# Altium PCB PCB1.pcbdoc
Units mil, origin at the board's own origin, x right, y up, seen from the top; angles counter-clockwise.
Board outline 6015 x 5210 mil, 2 copper layers (Top Layer, Bottom Layer); 51 components, 66 nets, 215 pads, 159 vias.
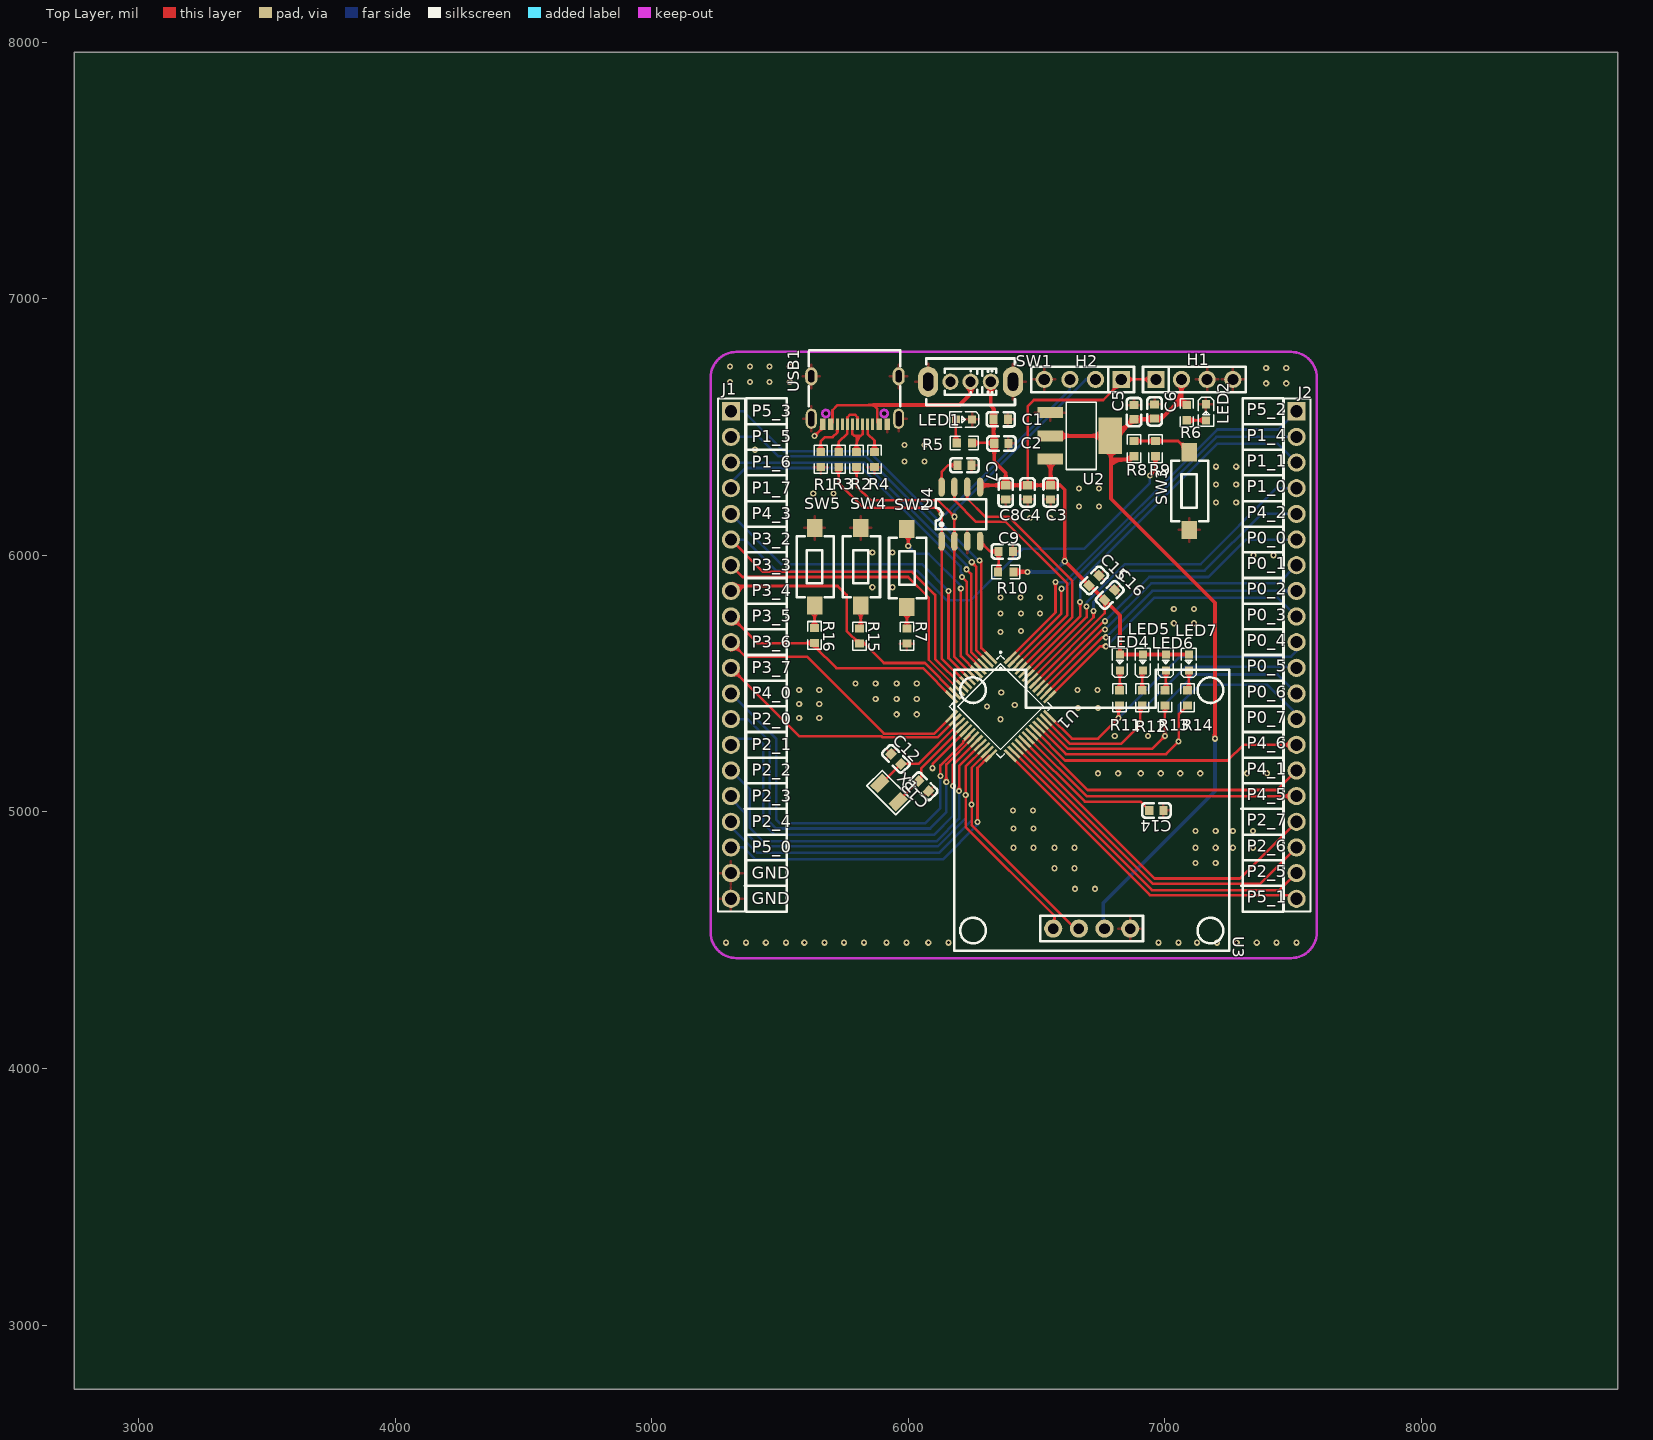
[diagram p0: Top Layer view]
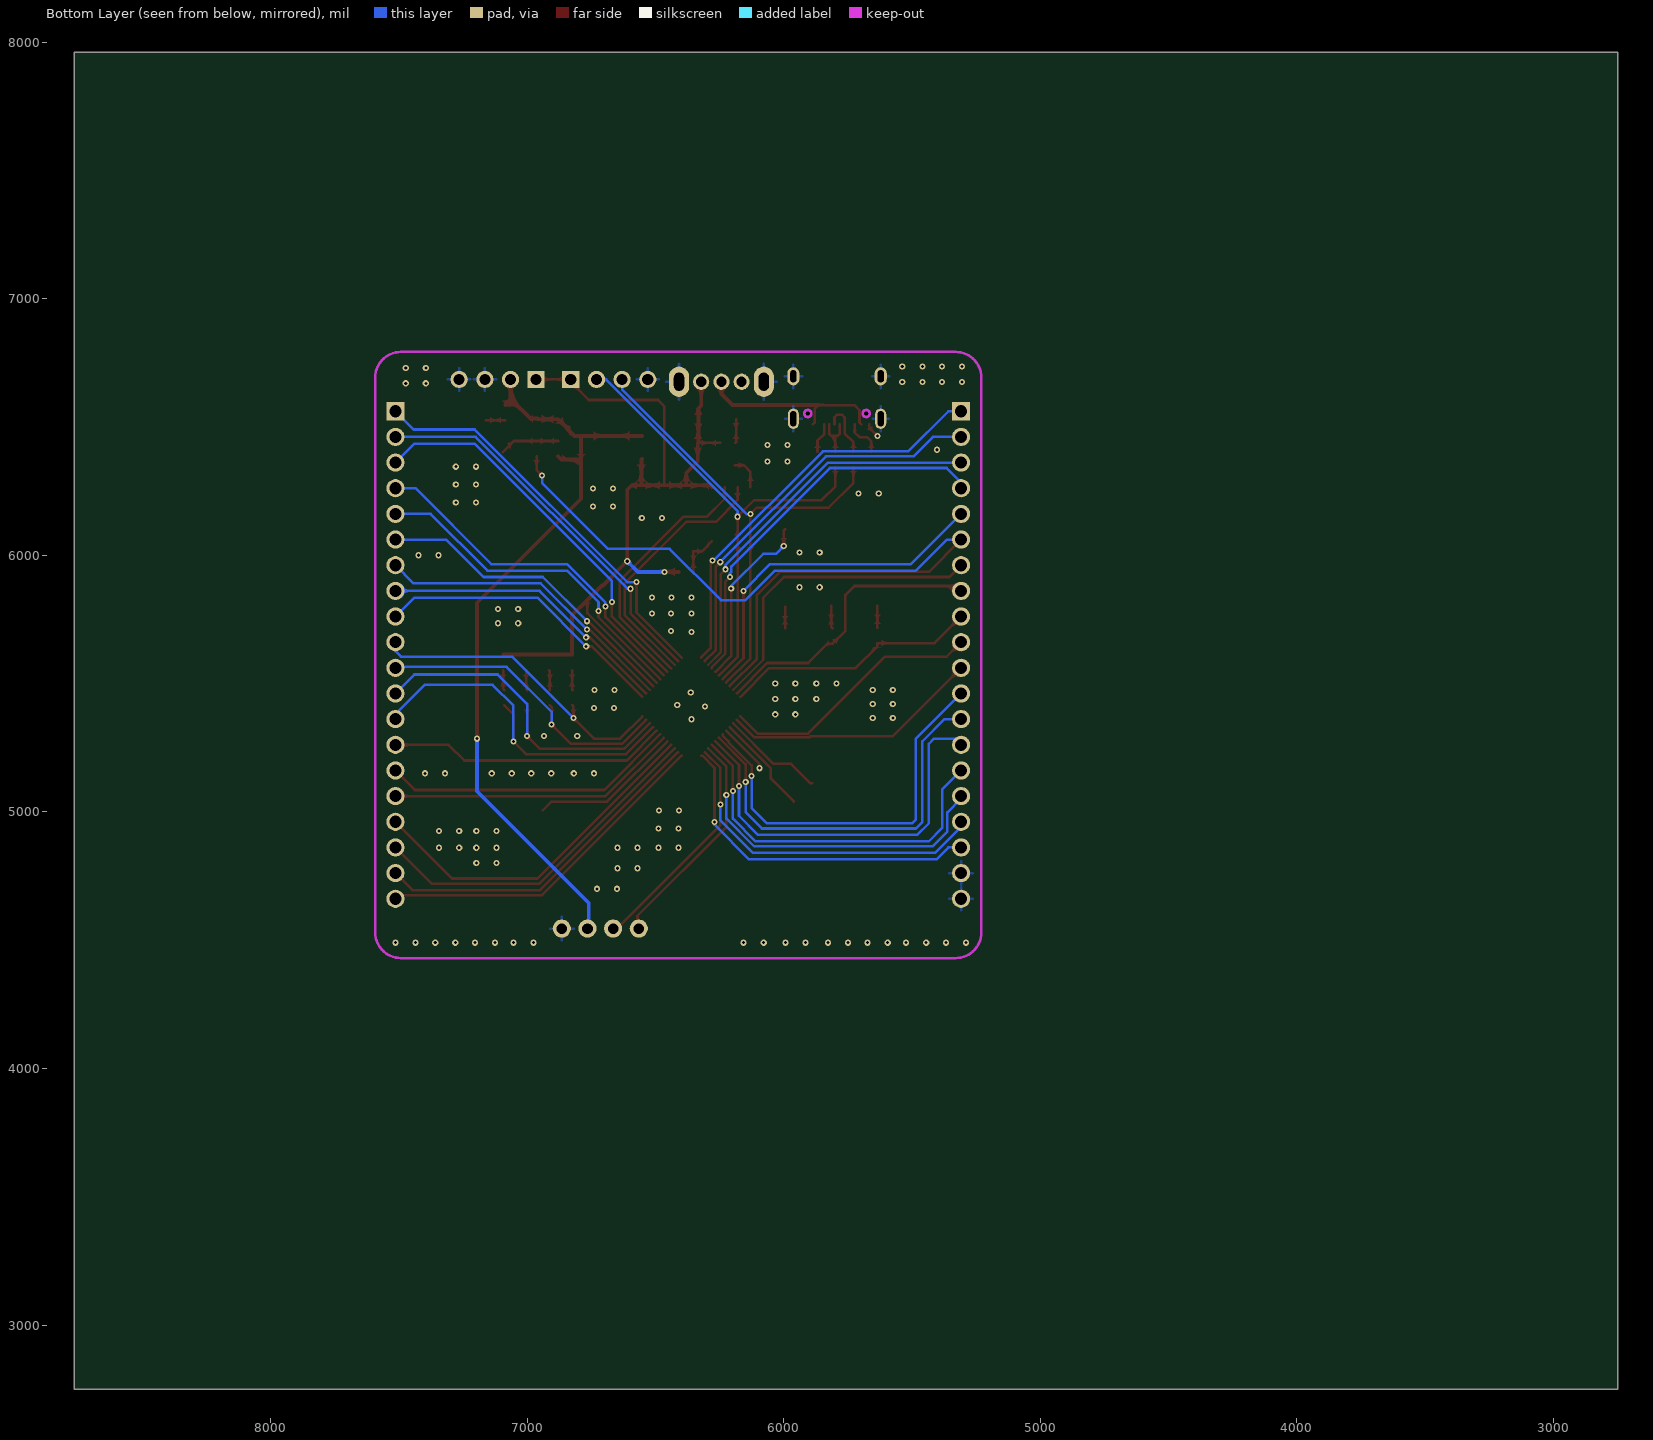
[diagram p1: Bottom Layer view, seen from below]

## Layer stack, top to bottom
Top Layer: signal copper (thickness not stored)
Dielectric: dielectric 12.6, FR-4, Dk 4.8
Bottom Layer: signal copper (thickness not stored)

## Board outline
8765,2750 2750,2750 2750,7960 8765,7960

## Design rules (kind name [scope] priority, off if disabled: settings)
Clearance copperThickness1oz [All] p1: gap=7 ignorepadtopadclearanceinfootprint=FALSE except(4: Track-Track; 6: Track-SMDPad SMDPad-SMDPad Track-THPad SMDPad-THPad THPad-THPad Track-Via SMDPad-Via THPad-Via Via-Via SMDPad-Fill THPad-Fill Via-Fill Fill-Fill Track-Region SMDPad-Region THPad-Region Via-Region Region-Region Track-Poly SMDPad-Poly THPad-Poly Via-Poly Fill-Poly Region-Poly Poly-Poly Track-Text SMDPad-Text THPad-Text Via-Text Fill-Text Region-Text Poly-Text Text-Text; 6.9: Track-Hole SMDPad-Hole THPad-Hole Via-Hole Fill-Hole Region-Hole Poly-Hole Text-Hole Sheet-Hole; 11.8: Track-Fill Fill-Region Track-Sheet SMDPad-Sheet THPad-Sheet Via-Sheet Fill-Sheet Region-Sheet Poly-Sheet Text-Sheet)
Clearance copperThickness2oz [All] p1: gap=7 ignorepadtopadclearanceinfootprint=FALSE except(6: Track-SMDPad SMDPad-SMDPad Track-THPad SMDPad-THPad THPad-THPad Track-Via SMDPad-Via THPad-Via Via-Via SMDPad-Fill THPad-Fill Via-Fill Fill-Fill Track-Region SMDPad-Region THPad-Region Via-Region Region-Region Track-Poly SMDPad-Poly THPad-Poly Via-Poly Fill-Poly Region-Poly Poly-Poly Track-Text SMDPad-Text THPad-Text Via-Text Fill-Text Region-Text Poly-Text Text-Text; 6.9: Track-Hole SMDPad-Hole THPad-Hole Via-Hole Fill-Hole Region-Hole Poly-Hole Text-Hole Sheet-Hole; 8: Track-Track; 11.8: Track-Fill Fill-Region Track-Sheet SMDPad-Sheet THPad-Sheet Via-Sheet Fill-Sheet Region-Sheet Poly-Sheet Text-Sheet)
DiffPairsRouting differentialPair [All] p1: maxuncoupledlength=10 maxlimit=6 mostfreqgap=6 toplayer_minwidth=5 toplayer_prefwidth=10 toplayer_maxwidth=100 bottomlayer_minwidth=5 bottomlayer_prefwidth=10 bottomlayer_maxwidth=100
PasteMaskExpansion pasteMaskExpansion [All] p1:
PlaneConnect innerPlane [All] p1: planeconnectstyle=Relief reliefexpansion=20 reliefentries=4 reliefconductorwidth=10 reliefairgap=10
PolygonConnect copperRegion [All] p1: connectstyle=Relief reliefentries=4 reliefconductorwidth=10 polygonreliefangle="90 Angle" airgapwidth=10
RoutingVias viaSize [All] p1: viastyle="Through Hole" holewidth=12.0078 minholewidth=11.811 maxholewidth=248.0314 width=24.0158 minwidth=19.685 maxwidth=393.7008
SolderMaskExpansion solderMaskExpansion [All] p1: useseparateexpansions=TRUE expansion=2 expansionbottom=2
Width copperThickness1oz [All] p1: maxlimit=100 minlimit=5 preferedwidth=10
Width copperThickness2oz [All] p1: maxlimit=100 minlimit=8 preferedwidth=10

## Components (designator, comment, footprint, x,y, rotation, side; value= is the part's Value field where it differs from the comment)
C1 "CGA0603X5R226M160JT" C0603 6360.47,6529.74 r180 top
C2 "CT41G-0603-2X1-50V-0.1μF-K(N)" C0603 6362.91,6435.6 r180 top
C3 "CT41G-0603-2X1-50V-0.1μF-K(N)" C0603 6555,6245 r90 top
C4 "CL10A106MA8NRNC" C0603 6465,6245 r90 top
C5 "CL10A106MA8NRNC" C0603 6879.83,6557.36 r270 top
C6 "CT41G-0603-2X1-50V-0.1μF-K(N)" C0603 6960,6560 r270 top
C7 "CT41G-0603-2X1-50V-0.1μF-K(N)" C0603 6218.93,6350.65 r180 top
C8 "CT41G-0603-2X1-50V-0.1μF-K(N)" C0603 6380,6245 r90 top
C9 "CT41G-0603-2X1-50V-0.1μF-K(N)" C0603 6380,6015 r180 top
C12 "CL10C200JB8NNNC" C0603 5952.38,5206.23 r315 top
C13 "CL10C200JB8NNNC" C0603 6060,5100 r135 top
C14 "CT41G-0603-2X1-50V-0.1μF-K(N)" C0603 6966.93,5005.51 r180 top
C15 "CT41G-0603-2X1-50V-0.1μF-K(N)" C0603 6724.49,5901.93 r225 top
C16 "CL10A106MA8NRNC" C0603 6785,5845 r225 top
H1 "PZ254V-11-04P" HDR-TH_4P-P2.54-V-M 7115,6685 r0 top
H2 "PZ254V-11-04P" HDR-TH_4P-P2.54-V-M 6680,6685 r180 top
J1 "2.54-1*20P直针" HDR-TH_20P-P2.54-V-M-1 5308.74,5611.1 r270 top locked
J2 "2.54-1*20P直针" HDR-TH_20P-P2.54-V-M-1 7513.46,5611.1 r270 top locked
LED1 "LED_0603-G" LED_0603 6215.17,6529.04 r180 top
LED2 "LED_0603-R" LED_0603 7160.7,6554.7 r270 top
LED4 "LED_0603-B" LED_0603 6824.64,5584.12 r90 top
LED5 "LED_0603-B" LED_0603 6914.2,5584.12 r90 top
LED6 "LED_0603-B" LED_0603 7003.76,5584.12 r90 top
LED7 "LED_0603-B" LED_0603 7093.32,5584.12 r90 top
R1 "0603WAF5101T5E" R0603 5658.89,6373.14 r270 top
R2 "0603WAF220JT5E" R0603 5798.65,6373.14 r270 top
R3 "0603WAF220JT5E" R0603 5728.77,6373.14 r270 top
R4 "0603WAF5101T5E" R0603 5868.52,6373.14 r270 top
R5 "0603WAF4701T5E" R0603 6218.86,6437.72 r180 top
R6 "0603WAF4701T5E" R0603 7085.6,6555.57 r270 top
R7 "0603WAF3000T5E" R0603 5995,5685 r270 top
R8 "0603WAF1002T5E" R0603 6879.66,6415.34 r270 top
R9 "0603WAF3000T5E" R0603 6963.3,6415.34 r90 top
R10 "0603WAF4701T5E" R0603 6380,5935 r0 top
R11 "0603WAF4701T5E" R0603 6823.38,5444.25 r270 top
R12 "0603WAF4701T5E" R0603 6911.83,5444.25 r270 top
R13 "0603WAF4701T5E" R0603 7000.27,5444.25 r270 top
R14 "0603WAF4701T5E" R0603 7088.72,5444.25 r270 top
R15 "0603WAF4701T5E" R0603 5810,5685 r270 top
R16 "0603WAF4701T5E" R0603 5635.08,5687.18 r270 top
SW1 "SS12D07VG3" SW-TH_SS12D07VG3 6242.94,6676.06 r180 top
SW2 "TS3625A" KEY-SMD_L6.0-W3.5-LS8.4 5995,5950 r270 top
SW3 "TS3625A" KEY-SMD_L6.0-W3.5-LS8.4 7095,6250 r270 top
SW4 "TS3625A" KEY-SMD_L6.0-W3.5-LS8.4 5815,5955 r270 top
SW5 "TS3625A" KEY-SMD_L6.0-W3.5-LS8.4 5635,5955 r270 top
U1 "AI8051U-34K64-QFP48" LQFP-48_L7.0-W7.0-P0.50-LS9.0-BL_1 6360,5410 r225 top
U2 "AMS1117-3.3_C6186" SOT-223-3_L6.5-W3.4-P2.30-LS7.0-BR 6670,6465 r180 top
U3 "HS96L03W2C03" OLED-TH_L27.8-W27.2-P2.54_C9900033791 6715,4545 r180 top locked
U4 "CH340N" SOP-8_L4.9-W3.9-P1.27-LS6.0-BL 6205,6160 r0 top
USB1 "TYPE-C 16PIN 2MD(073)" USB-C-SMD_TYPE-C-6PIN-2MD-073 5792.53,6603.68 r180 top
X1 "X321532768KGD2SI" OSC-SMD_L3.2-W1.5 5925,5075 r135 top

## Footprints (in the part's own frame and the unit in brackets; to place one, negate y for a bottom-side part, rotate by r counter-clockwise, add the part's x,y. Pads: shape width x height; smd on the part's side, far side on the other; paste and mask are expansions set on the pad)
C0603 [mm]
  rect 0.8x0.9 smd: 1(-0.7,0) 2(0.7,0)
  silkscreen extent -1.41,-0.71 1.39,0.72
HDR-TH_4P-P2.54-V-M [mm]
  rect 1.7x1.7 hole 1.1: 1(-3.81,0)
  round 1.7 hole 1.1: 2(-1.27,0) 3(1.27,0) 4(3.81,0)
  silkscreen extent -5.08,-1.27 5.08,1.27
HDR-TH_20P-P2.54-V-M-1 [mm]
  rect 1.8x1.8 hole 1.2: 1(-24.13,0)
  round 1.8 hole 1.2: 2(-21.59,0) 3(-19.05,0) 4(-16.51,0) 5(-13.97,0) 6(-11.43,0) 7(-8.89,0) 8(-6.35,0) 9(-3.81,0) 10(-1.27,0) 11(1.27,0) 12(3.81,0) 13(6.35,0) 14(8.89,0) 15(11.43,0) 16(13.97,0) 17(16.51,0) 18(19.05,0) 19(21.59,0) 20(24.13,0)
  silkscreen extent -25.4,-1.27 25.4,1.4
KEY-SMD_L6.0-W3.5-LS8.4 [mm]
  rect 1.8x1.524 smd: 1(-3.85,0) 2(3.85,0)
  silkscreen extent -3,-1.78 3,1.91
LED_0603 [mil]
  rect 31.5x31.5 smd: 1(-33.5,-0.4) 2(29.5,-0.2)
  silkscreen extent -61,-30 53,30
LQFP-48_L7.0-W7.0-P0.50-LS9.0-BL_1 [mm]
  rect 0.28x1.62 smd: 1(-2.75,-4.11) 2(-2.25,-4.11) 3(-1.75,-4.11) 4(-1.25,-4.11) 5(-0.75,-4.11) 6(-0.25,-4.11) 7(0.25,-4.11) 8(0.75,-4.11) 9(1.25,-4.11) 10(1.75,-4.11) 11(2.25,-4.11) 12(2.75,-4.11) 26(2.25,4.11) 27(1.75,4.11) 28(1.25,4.11) 29(0.75,4.11) 30(0.25,4.11) 31(-0.25,4.11) 32(-0.75,4.11) 33(-1.25,4.11) 34(-1.75,4.11) 35(-2.25,4.11) 36(-2.75,4.11)
  rect 1.62x0.28 smd: 13(4.11,-2.75) 14(4.11,-2.25) 15(4.11,-1.75) 16(4.11,-1.25) 17(4.11,-0.75) 18(4.11,-0.25) 19(4.11,0.25) 20(4.11,0.75) 22(4.11,1.75) 23(4.11,2.25) 24(4.11,2.75) 37(-4.11,2.75) 38(-4.11,2.25) 39(-4.11,1.75) 40(-4.11,1.25) 41(-4.11,0.75) 42(-4.11,0.25) 43(-4.11,-0.25) 44(-4.11,-0.75) 45(-4.11,-1.25) 46(-4.11,-1.75) 47(-4.11,-2.25) 48(-4.11,-2.75)
  rect 1.62x0.28 smd rot 179.23: 21(4.11,1.25)
  rect 0.28x1.62 smd rot 179.23: 25(2.75,4.11)
  silkscreen extent -3.9,-3.9 3.58,3.58
OLED-TH_L27.8-W27.2-P2.54_C9900033791 [mm]
  round 1.8 hole 1.05: 1(-3.81,0) 2(-1.27,0) 3(1.27,0) 4(3.81,0)
  silkscreen extent -13.6,-25.6 13.6,2.2
OSC-SMD_L3.2-W1.5 [mm]
  rect 1.05x1.7 smd: 1(-1.275,0) 2(1.275,0)
  silkscreen extent -2.03,-1.08 2.03,1.08
R0603 [mil]
  rect 31.75x34.02 smd: 1(-29.66,0) 2(29.66,0)
  silkscreen extent -55,-26 55,26
SOP-8_L4.9-W3.9-P1.27-LS6.0-BL [mm]
  oval 0.63x1.865 smd: 1(-1.905,-2.682) 2(-0.635,-2.682) 3(0.635,-2.682) 4(1.905,-2.682) 5(1.905,2.682) 6(0.635,2.682) 7(-0.635,2.682) 8(-1.905,2.682)
  silkscreen extent -2.5,-1.5 2.5,1.48
SOT-223-3_L6.5-W3.4-P2.30-LS7.0-BR [mm]
  rect 2.5x1.1 smd: 1(2.97,-2.3) 2(2.97,0) 3(2.97,2.3)
  rect 2.34x3.6 smd: 4(-2.97,0)
  silkscreen extent -1.57,-3.33 1.37,3.33
SW-TH_SS12D07VG3 [mm]
  round 1.6 hole 1: 1(-2,0) 2(0,0) 3(2,0)
  oval 2x3 hole 1 slot 1.8 at 90 deg: 4(4.2,0) 5(-4.2,0)
  silkscreen extent -4.4,-2.3 4.4,2.3
USB-C-SMD_TYPE-C-6PIN-2MD-073 [mm]
  rect 0.55x1.1 smd: 1(-3.2,2.375) 2(-2.4,2.375) 11(2.4,2.375) 12(3.2,2.375)
  rect 0.3x1.1 smd: 3(-1.75,2.375) 4(-1.25,2.375) 5(-0.75,2.375) 6(-0.25,2.375) 7(0.25,2.375) 8(0.75,2.375) 9(1.25,2.375) 10(1.75,2.375)
  oval 1.2x1.8 hole 0.6 slot 1.2 at 90 deg: 13(-4.325,-2.375) 14(4.325,-2.375)
  oval 1.1x2 hole 0.6 slot 1.5 at 90 deg: 13(-4.325,1.825) 14(4.325,1.825)
  Multi-Layer board cut-out: -3.24,1.305 -3.191,1.133 -3.063,1.007 -2.89,0.961 -2.717,1.007 -2.589,1.133 -2.54,1.305 -2.54,1.305 -2.589,1.477 -2.717,1.603 -2.89,1.649 -3.063,1.603 -3.191,1.477 -3.24,1.305
  Multi-Layer board cut-out: 2.54,1.305 2.589,1.133 2.717,1.007 2.89,0.961 3.063,1.007 3.191,1.133 3.24,1.305 3.24,1.305 3.191,1.477 3.063,1.603 2.89,1.649 2.717,1.603 2.589,1.477 2.54,1.305
  Multi-Layer keep-out circle w0.254: c-2.89,1.305 r0.35
  Multi-Layer keep-out circle w0.254: c2.89,1.305 r0.35
  silkscreen extent -4.5,-4.97 4.57,0.6

## Via types
v1: diameter 24.02, hole 12.01, Top Layer to Bottom Layer, 159 vias

## Nets (pads, with @x,y where several pads share a name; then routed paths per layer and width w, separated by ;. In a path a pad name is that pad's centre, name@x,y a point inside that pad or via, vN(x,y) a via of type N, cw(c..) or ccw(c..) an arc to the next point about the centre after c; other vN are vias at no path point)
3V3: C5.2 C6.2 H1.2 R6.1 R8.2 U2.2 U2.4 U3.2 | length 3049.4
  Top Layer w10: 6790,6380 6797.07,6372.93
  Top Layer w15: U2.2 U2.4 ; 6797.07,6372.93 6866.91,6372.93 R8.2 ; H1.2 7065,6610 ; R6.1 7065,6605.83 7065,6610 ; v1(7195,5285) 7195,5815 6790,6220 6790,6380 6790,6461.93 U2.4 ; U2.4 6815.03,6465 C5.2 6957.36,6529.8 C6.2 6987.44,6532.44 7065,6610
  Bottom Layer w15: U3.2 6760,4550 6760,4645 7195,5080 v1(7195,5285)
5V_USB: SW1.2 USB1.2 USB1.11 | length 753.8
  Top Layer w10: USB1.11 5705,6517.14 5705,6565 5725,6585 5865,6585 5880,6570 5880,6517.19 USB1.2
  Top Layer w15: 5865,6585 6200,6585 6242.94,6627.94 SW1.2
$1N819: R3.1 USB1.6 USB1.8 | length 224.1
  Top Layer w10: R3.1 5728.77,6440.76 5763.01,6475 USB1.8 5763.01,6537.62 5773.01,6547.62 5792.38,6547.62 5802.38,6537.62 USB1.6
$1N847: R2.1 USB1.5 USB1.7 | length 185
  Top Layer w10: USB1.7 5782.69,6472.31 5790,6465 5795,6465 ; R2.1 5798.65,6461.35 5795,6465 ; USB1.5 5822.06,6472.06 5815,6465 5795,6465
$1N1012: R1.1 USB1.10 | length 151.8
  Top Layer w10: R1.1 5658.89,6443.89 5675,6460 5705,6460 5723.63,6478.63 USB1.10
$1N1016: R4.1 USB1.4 | length 118.5
  Top Layer w10: USB1.4 5841.74,6473.26 5868.52,6446.48 R4.1
$1N1689: LED1.2 R5.2 | length 93
  Top Layer w10: LED1.2 6185.67,6441.24 R5.2
$1N3306: LED2.2 R6.2 | length 75.2
  Top Layer w10: R6.2 7159.79,6525.91 LED2.2
$1N3751: C7.2 U4.8 | length 131.4
  Top Layer w10: U4.8 6130,6325 6155.65,6350.65 C7.2
$1N3863: C9.2 R10.1 U4.4 | length 169.6
  Top Layer w10: U4.4 6319.39,6015 C9.2 6352.44,5937.1 R10.1
$2N462: R7.1 SW2.2 | length 83.8
  Top Layer w10: R7.1 SW2.2
$2N802: C14.2 U1.29 | length 597.3
  Top Layer w10: U1.29 6688.24,5040 6904.88,5040 C14.2
$2N2370: R8.1 R9.2 SW3.1 | length 233.3
  Top Layer w10: R8.1 R9.2 7051.57,6445 SW3.1
$2N3730: LED4.1 R11.1 | length 77.4
  Top Layer w10: R11.1 6825.04,5475.57 LED4.1
$2N3732: LED5.1 R12.1 | length 77.9
  Top Layer w10: R12.1 6911.83,5547.85 LED5.1
$2N3734: LED6.1 R13.1 | length 78.3
  Top Layer w10: R13.1 7004.16,5477.8 LED6.1
$2N3736: LED7.1 R14.1 | length 78.8
  Top Layer w10: R14.1 7093.72,5478.91 LED7.1
$2N4037: R15.1 SW4.2 | length 90.8
  Top Layer w10: R15.1 5815,5719.66 SW4.2
$2N4054: R16.1 SW5.2 | length 86.6
  Top Layer w10: SW5.2 5635,5716.92 R16.1
+5V: C1.2 C2.2 C3.2 C4.2 C8.2 C15.2 C16.2 H1.1 H2.1 LED4.2 LED5.2 LED6.2 LED7.2 R5.1 R10.2 SW1.1 U1.41 U2.3 U4.5 | length 3465.3
  Top Layer w10: R5.1 C2.2@6333.23,6437.72 ; C4.2 6465,6580 6490,6605 6760,6605 6830,6675 H2.1 H1.1 ; U1.41 6765.51,5773.75 C16.2
  Top Layer w15: U4.5 6286.95,6272.56 C8.2 ; SW1.1 6321.68,6583.32 6332.91,6572.09 C1.2 6332.91,6438.04 6333.23,6437.72 C2.2 6335.35,6365 6380,6320.35 C8.2 ; R10.2 v1(6465,5935) ; U2.3 6555,6372.52 C3.2 ; LED7.2 LED6.2 LED5.2 LED4.2 6825,5613.79 6825,5766.02 C16.2 6708.58,5882.44 C15.2 6610.85,5976.59 v1(6610,5976.59) 6610,6255 6592.44,6272.56 C3.2 ; C8.2 C4.2 C3.2
  Bottom Layer w15: v1(6465,5935) 6568.41,5935 v1(6610,5976.59)
D+: H2.3 R3.2 U1.8 U4.1 | length 1950.3
  Top Layer w10: R3.2 5728.77,6281.23 5825,6185 6105.44,6185 v1(6130.22,6160.22) 6130.22,6054.61 U4.1 6130,5598.24 U1.8
  Bottom Layer w10: v1(6130.22,6160.22) 6145.04,6160.22 6630,6645.19 H2.3
D-: H2.2 R2.2 U1.6 U4.2 | length 1938.7
  Top Layer w10: R2.2 5798.65,6268.48 5852.12,6215 6115,6215 v1(6180,6150) U4.2 6180,5603.92 U1.6
  Bottom Layer w10: v1(6180,6150) 6180,6172.14 6692.86,6685 H2.2
GND: C1.1 C2.1 C3.1 C4.1 C5.1 C6.1 C7.1 C8.1 C9.1 C12.1 C13.1 C14.1 C15.1 C16.1 H1.3 H1.4 H2.4 J1.19 J1.20 LED1.1 LED2.1 R1.2 R4.2 R7.2 SW1.4 SW1.5 SW3.2 SW4.1 SW5.1 U1.17 U2.1 U3.1 U4.3 USB1.1 USB1.12 USB1.13 USB1.14 | length 258.4
  Top Layer w10: v1(5635,6465) 5666.55,6496.55 USB1.12 ; v1(6095,5170) 6095,5186.76 U1.17
  other v1: 5290,4490 5368.2,4490 5445,4490 5523.2,4490 5595,4490 5673.2,4490 5750,4490 5828.2,4490 5915,4490 5993.2,4490 6078.27,4490 6156.48,4490 6975,4490 7053.2,4490 7125,4490 7203.2,4490 7280,4490 7358.2,4490 7435,4490 7513.2,4490 6650,4700 6728.2,4700 6570,4780 6648.2,4780 7120,4800 7198.2,4800 6410,4860 6488.2,4860 6570,4860 6648.2,4860 7120,4860 7198.2,4860 7265,4860 7343.2,4860 7120,4925 7198.2,4925 7265,4925 7343.2,4925 6410,4935 6488.2,4935 6408.34,5005.63 6486.54,5005.63 6740,5150 6818.2,5150 6906.03,5150 6984.23,5150 7060,5150 7138.2,5150 7320,5150 7398.2,5150 6805,5295 6935,5295 6360,5360.78 5575,5365 5653.2,5365 5955,5380 6033.2,5380 6661.66,5405.2 6739.86,5405.2 6307.32,5409.95 6415.3,5416.07 5575,5420 5653.2,5420 5873.2,5440 5955,5440 6033.2,5440 6362.62,5465.25 5575,5475 5653.2,5475 6660,5475 6738.2,5475 5795,5500 5873.2,5500 5955,5500 6033.2,5500 6359.58,5700.62 6440,5705 7035,5735 7113.2,5735 6359.58,5773.21 6438.93,5773.21 6513.95,5773.21 7035,5790 7113.2,5790 6360,5835 6438.2,5835 6513.95,5835 5860,5875 5938.2,5875 7345,6000 7423.2,6000 5860,6010 5938.2,6010 6475,6145 6553.2,6145 6665,6190 6743.2,6190 7200,6205 7278.2,6205 5630,6240 5708.2,6240 6665,6260 6743.2,6260 7200,6275 7278.2,6275 7200,6345 7278.2,6345 5985,6365 6063.2,6365 5402.69,6411.1 5985,6430 6063.2,6430 7395,6670 7473.2,6670 5305,6675 5383.2,6675 5460,6675 5538.2,6675 7395,6730 7473.2,6730 5305,6735 5383.2,6735 5460,6735 5538.2,6735
KEY1: J1.8 R15.2 U1.11 | length 1137.1
  Top Layer w10: J1.8 5327.64,5880 5725,5880 5760,5845 5760,5705.34 R15.2 5829.66,5655.34 5905,5580 6064.73,5580 U1.11
KEY2: J1.9 R16.2 U1.12 | length 997.4
  Top Layer w10: J1.9 5412.32,5657.52 R16.2 5635.08,5644.92 5720,5560 6056.88,5560 U1.12
LED1: J2.10 R11.2 U1.36 | length 1225.5
  Top Layer w10: U1.36 6638.12,5285 6740,5285 v1(6820,5365) 6820,5411.21 R11.2
  Bottom Layer w10: v1(6820,5365) 7060,5605 7491.72,5605 7513.46,5626.75 J2.10
LED2: J2.11 R12.2 U1.35 | length 1247.6
  Top Layer w10: U1.35 6630.27,5265 6830,5265 v1(6905,5340) 6905,5407.77 R12.2
  Bottom Layer w10: v1(6905,5340) 6905,5390 7080,5565 7509.57,5565 J2.11
LED3: J2.12 R13.2 U1.34 | length 1374.7
  Top Layer w10: U1.34 6622.44,5245 6950,5245 v1(7000.27,5295.27) R13.2
  Bottom Layer w10: v1(7000.27,5295.27) 7000.27,5420.27 7115,5535 7439.57,5535 J2.12
LED4: J2.13 R14.2 U1.33 | length 1464.6
  Top Layer w10: U1.33 6614.59,5225 7005,5225 v1(7053.72,5273.72) 7053.72,5379.59 R14.2
  Bottom Layer w10: v1(7053.72,5273.72) 7053.72,5413.72 7135,5495 7400,5495 7513.46,5381.54 J2.13
NRST: SW2.1 U1.5 | length 697.7
  Top Layer w10: SW2.1 6000,6096.57 v1(6000,6035.5) ; v1(6205,5870) 6205,5606.76 U1.5
  Bottom Layer w10: v1(6000,6035.5) 6030.5,6005 6080,6005 6205,5880 v1(6205,5870)
P0_0: J2.6 U1.40 | length 1241
  Top Layer w10: U1.40 6762.45,5742.86 v1(6767.14,5742.86)
  Bottom Layer w10: v1(6767.14,5742.86) 6939.28,5915 7170,5915 7316.1,6061.1 J2.6
P0_1: J2.7 U1.39 | length 1189.3
  Top Layer w10: U1.39 6757.44,5710 v1@6765,5710
  Bottom Layer w10: v1(6767.14,5710) 6947.14,5890 7442.36,5890 J2.7
P0_2: J2.8 U1.38 | length 1141.8
  Top Layer w10: U1.38 6537.64,5461.78 6755.86,5680 v1(6770,5680)
  Bottom Layer w10: v1(6770,5680) 6951.1,5861.1 J2.8
P0_3: J2.9 U1.37 | length 1153.5
  Top Layer w10: U1.37 6748.12,5645 v1(6770,5645)
  Bottom Layer w10: v1(6770,5645) 6960,5835 7439.57,5835 J2.9
P1_0: J2.4 U1.43 | length 1381.1
  Top Layer w10: U1.43 6695,5758.92 v1(6695,5800)
  Bottom Layer w10: v1(6695,5800) 6695,5815 6845,5965 7140,5965 7436.1,6261.1 J2.4
P1_1: J2.3 U1.44 | length 1531.8
  Top Layer w10: U1.44 6670,5761.76 v1@6670,5810
  Bottom Layer w10: v1(6670,5818.27) 6670,5900 7205,6435 7439.57,6435 J2.3
P1_2: U1.45 U4.6 | length 1011.9
  Top Layer w10: U4.6 6230,6220 6300,6150 6390,6150 6640,5900 6640,5759.59 U1.45
P1_3: U1.46 U4.7 | length 1022.6
  Top Layer w10: U4.7 6180,6215 6265,6130 6380,6130 6620,5890 6620,5767.44 U1.46
P1_4: J2.2 U1.47 | length 1520.6
  Top Layer w10: U1.47 6597.01,5772.28 v1(6597.01,5869.43)
  Bottom Layer w10: v1(6597.01,5869.43) 6609.43,5869.43 7201.1,6461.1 J2.2
P1_5: J1.2 U1.2 | length 1552
  Top Layer w10: v1(6247.72,5972.78) 6265,5955.5 6265,5630.27 U1.2
  Bottom Layer w10: J1.2 5418.9,6461.1 5495,6385 5835.5,6385 v1(6247.72,5972.78)
P1_6: J1.3 U1.3 | length 1499.7
  Top Layer w10: v1(6227.01,5945) 6245,5927.01 6245,5622.44 U1.3
  Bottom Layer w10: J1.3 5826.88,6361.1 6227.01,5960.98 v1(6227.01,5945)
P1_7: J1.4 U1.4 | length 1528.7
  Top Layer w10: v1(6210,5915) 6227.99,5897.01 6227.99,5616.12 6280.38,5563.73 U1.4
  Bottom Layer w10: J1.4 5308.74,6283.74 5365,6340 5820,6340 6204.02,5955.98 6204.02,5935.48 6210,5929.49 v1(6210,5915)
P2_0: J1.13 U1.19 | length 1560.3
  Top Layer w10: v1(6148.37,5116.63) 6148.37,5184.45 U1.19
  Bottom Layer w10: J1.13 5373.9,5361.1 5460,5275 5460,4960 5485,4935 6085,4935 6148.37,4998.37 v1(6148.37,5116.63)
P2_1: J1.14 U1.20 | length 1571.7
  Top Layer w10: v1(6174.58,5100.42) 6174.58,5182.82 U1.20
  Bottom Layer w10: J1.14 5332.64,5285 5415,5285 5435,5265 5435,4955 5480,4910 6100,4910 6174.58,4984.58 v1(6174.58,5100.42)
P2_2: J1.15 U1.21 | length 1449.8
  Top Layer w10: v1(6198.29,5081.71) 6198.29,5178.7 U1.21
  Bottom Layer w10: J1.15 5382.93,5086.91 5382.93,4937.07 5435,4885 6110,4885 6198.29,4973.29 v1(6198.29,5081.71)
P2_3: J1.16 U1.22 U3.4 | length 2058.7
  Top Layer w10: U1.22 6224.02,5176.58 v1(6224.02,5065) 6224.02,4940.98 6570,4595 6570,4550 U3.4
  Bottom Layer w10: J1.16 5308.74,5051.26 5362.5,4997.5 5362.5,4922.5 5420,4865 6115,4865 6224.02,4974.02 v1(6224.02,5065)
P2_4: J1.17 U1.23 U3.3 | length 2008.9
  Top Layer w10: U1.23 6247.01,5171.74 v1(6247.01,5027.99) 6247.01,4947.99 6650,4545 U3.3
  Bottom Layer w10: J1.17 5308.74,4941.26 5410,4840 6120,4840 6247.01,4967.01 v1(6247.01,5027.99)
P2_5: J2.19 U1.26 | length 1351.9
  Top Layer w10: U1.26 6949.73,4695 7447.36,4695 J2.19
P2_6: J2.18 U1.27 | length 1364.4
  Top Layer w10: U1.27 6952.56,4720 7372.36,4720 J2.18
P2_7: J2.17 U1.28 | length 1381.1
  Top Layer w10: U1.28 6960.41,4740 7292.36,4740 J2.17
P3_2: J1.6 R9.1 U1.9 | length 3317.8
  Top Layer w10: J1.6 5434.84,5935 6015,5935 6105,5845 6105,5595.41 U1.9 ; v1(6941.79,6310.29) 6963.3,6331.8 R9.1
  Bottom Layer w10: J1.6 5363.9,6061.1 5485,5940 6035,5940 6150,5825 6245,5825 6445,6025 6685,6025 6941.79,6281.79 v1(6941.79,6310.29)
P3_3: J1.7 U1.10 | length 1231.2
  Top Layer w10: J1.7 5354.84,5915 6000,5915 6080,5835 6080,5592.56 U1.10
P3_6: J1.10 U1.13 | length 1035.6
  Top Layer w10: J1.10 5364.84,5605 5605,5605 5905,5305 6101.88,5305 U1.13
P3_7: J1.11 U1.14 | length 1013.9
  Top Layer w10: J1.11 5574.84,5295 5895.18,5295 5899.19,5290.98 6115.71,5290.98 U1.14
P4_0: J1.12 U1.18 | length 1569.8
  Top Layer w10: v1(6125.38,5139.62) 6125.38,5181.28 6215.11,5271.02 6215.11,5274.52 6238.63,5298.04 U1.18
  Bottom Layer w10: J1.12 5485,5284.84 5485,4970 5500,4955 6065,4955 6125.38,5015.38 v1(6125.38,5139.62)
P4_1: J2.15 U1.31 | length 1153.7
  Top Layer w10: U1.31 6698.92,5085 7437.36,5085 J2.15
P4_2: 
P4_3: J1.5 U1.7 | length 1349.9
  Top Layer w10: v1(6157.01,5860.92) 6157.01,5599.08 U1.7
  Bottom Layer w10: J1.5 5504.84,5965 6052.93,5965 v1(6157.01,5860.92)
P4_5: J2.16 U1.30 | length 1140.2
  Top Layer w10: U1.30 6694.98,5061.1 J2.16
P4_6: J2.14 U1.32 | length 1091.7
  Top Layer w10: U1.32 6611.76,5200 7245,5200 7306.1,5261.1 J2.14
P5_0: J1.18 U1.24 | length 1329.5
  Top Layer w10: v1(6270,4960) 6270,5171.4 6317.62,5219.02 U1.24
  Bottom Layer w10: J1.18 5358.9,4861.1 5405,4815 6135,4815 6270,4950 v1(6270,4960)
P5_1: J2.20 U1.25 | length 1346.7
  Top Layer w10: U1.25 6941.88,4675 7499.57,4675 J2.20
P5_2: J2.1 U1.48 | length 1582.3
  Top Layer w10: U1.48 6574.02,5777.13 v1(6574.02,5895)
  Bottom Layer w10: v1(6574.02,5895) 6610,5895 7205,6490 7442.36,6490 J2.1
P5_3: J1.1 U1.1 | length 1607.2
  Top Layer w10: v1(6277.93,5980) 6285,5972.93 6285,5638.12 U1.1
  Bottom Layer w10: J1.1 5358.9,6561.1 5515,6405 5848.02,6405 6273.02,5980 v1(6277.93,5980)
XTALI: C13.2 U1.16 X1.1 | length 394.5
  Top Layer w10: X1.1 C13.2 6050,5128.98 6050,5169.59 U1.16
XTALO: C12.2 U1.15 X1.2 | length 404.2
  Top Layer w10: X1.2 5895.62,5110.5 C12.2 6039.31,5186.74 U1.15
pads on no net: J2.5 SW1.3 U1.42 USB1.3 USB1.9
copper on no net: | length 1333.2
  Top Layer w10: 6481.37,5517.46 6722.12,5758.21 v1(6722.12,5782.88)
  Bottom Layer w10: v1(6722.12,5782.88) 6722.12,5817.12 6845,5940 7155,5940 7376.1,6161.1 7513.46,6161.1

## Polygon pours and split planes (outlines as drawn)
GND on Top Layer (solid, remove dead copper): 5055,7080 8060,7080 8225,6915 8225,4685 7545,4005 5005,4005 4905,4105 5055,4255
GND on Bottom Layer (solid, remove dead copper, pour order 2): 4555,7710 8420,7710 8515,7615 8515,3205 8310,3000 3375,3000 3000,3375 3000,6155

## Keep-outs
Board Outline Layer:
  lines w10: 5230,4530 ccw(c5330,4530) 5330,4430 7492.2,4430 ccw(c7492.2,4530) 7592.2,4530 7592.2,6692.2 ccw(c7492.2,6692.2) 7492.2,6792.2 5330,6792.2 ccw(c5330,6692.2) 5230,6692.2 5230,4530

## Other copper
Top Layer:
  region net +5V: 6304.6,6432.72 6304.6,6442.72 ccw(c6304.6,6461.47) 6319.6,6450.22 6319.6,6425.22 ccw(c6304.6,6413.97)
  region net +5V: 6325.41,6475.81 6340.41,6475.81 ccw(c6369.44,6475.81) 6351.1,6453.31 6319.6,6453.31 ccw(c6278.93,6475.81)
  region net +5V: 6342.85,6395.38 6327.85,6395.38 ccw(c6293.04,6395.38) 6319.6,6417.88 6351.1,6417.88 ccw(c6377.66,6395.38)
  region net +5V: 6514.78,6265.06 6514.78,6280.06 ccw(c6514.78,6314.87) 6537.28,6288.31 6537.28,6256.81 ccw(c6514.78,6230.25)
  region net +5V: 6592.44,6280.06 6592.44,6265.06 ccw(c6592.44,6237.35) 6572.72,6256.81 6572.72,6288.31 ccw(c6592.44,6307.77)
  region net +5V: 6547.5,6310.81 6562.5,6310.81 ccw(c6592.38,6310.81) 6572.72,6288.31 6537.28,6288.31 ccw(c6517.62,6310.81)
  region net 3V3: 6919.78,6522.3 6919.78,6537.3 ccw(c6919.78,6566) 6942.28,6548.19 6942.28,6516.69 ccw(c6919.78,6474.37)
  region net 3V3: 6987.44,6539.94 6987.44,6524.94 ccw(c6987.44,6515.08) 6977.72,6516.69 6977.72,6548.19 ccw(c6987.44,6549.8)
  region net +5V: 6424.78,6265.06 6424.78,6280.06 ccw(c6424.78,6314.87) 6447.28,6288.31 6447.28,6256.81 ccw(c6424.78,6230.25)
  region net +5V: 6505.22,6280.06 6505.22,6265.06 ccw(c6505.22,6230.25) 6482.72,6256.81 6482.72,6288.31 ccw(c6505.22,6314.87)
  region net 3V3: 6866.73,6506.1 6854.16,6514.74 ccw(c6822.34,6538.6) 6862.11,6538.6 6890.6,6514.05 ccw(c6890.6,6474.28)
  region net 3V3: 6920.05,6537.3 6920.05,6522.3 ccw(c6920.05,6487.49) 6897.55,6514.05 6897.55,6545.55 ccw(c6920.05,6572.11)
  region net +5V: 6770.51,5797.96 6760.51,5800.74 ccw(c6734.26,5796.99) 6753.01,5815.74 6778.01,5812.96 ccw(c6796.76,5794.21)
  region net +5V: 6420.22,6280.06 6420.22,6265.06 ccw(c6420.22,6230.25) 6397.72,6256.81 6397.72,6288.31 ccw(c6420.22,6314.87)
  region net +5V: 6372.5,6310.81 6387.5,6310.81 ccw(c6417.38,6310.81) 6397.72,6288.31 6362.28,6288.31 ccw(c6342.62,6310.81)
  region net +5V: 6339.78,6265.06 6339.78,6280.06 ccw(c6339.78,6314.87) 6362.28,6288.31 6362.28,6256.81 ccw(c6339.78,6230.25)
  region net $1N3751: 6160.62,6345.65 6160.62,6355.65 ccw(c6160.62,6374.4) 6175.62,6363.15 6175.62,6338.15 ccw(c6160.62,6326.9)
  region net $1N3863: 6357.44,5982.28 6347.44,5982.28 ccw(c6328.69,5982.28) 6339.94,5997.28 6364.94,5997.28 ccw(c6376.19,5982.28)
  region net $1N3863: 6321.69,6010 6321.69,6020 ccw(c6321.69,6038.75) 6336.69,6027.5 6336.69,6002.5 ccw(c6321.69,5991.25)
  region net +5V: 6916.54,6680 6916.54,6690 ccw(c6916.54,6708.75) 6931.54,6697.5 6931.54,6672.5 ccw(c6916.54,6661.25)
  region net 3V3: 7072.5,6639.27 7057.5,6639.27 7057.4,6641.58 7057.11,6643.63 7056.64,6645.45 7056,6647.07 7055.21,6648.53 7054.28,6649.85 7052.05,6652.23 7049.41,6654.44 7046.46,6656.76 7043.31,6659.42 7040.06,6662.69 7089.94,6662.69 7086.69,6659.42 7083.54,6656.76 7080.59,6654.44 7077.95,6652.23 7075.72,6649.85 7074.79,6648.53 7074,6647.07 7073.36,6645.45 7072.89,6643.63 7072.6,6641.58
  region net +5V: 6878.46,6690 6878.46,6680 ccw(c6878.46,6661.25) 6863.46,6672.5 6863.46,6697.5 ccw(c6878.46,6708.75)
  region net P3_7: 5346.52,5530.4 5339.45,5523.33 5337.38,5525.21 5335.44,5526.65 5333.59,5527.69 5331.8,5528.36 5330.07,5528.73 5328.34,5528.84 5326.62,5528.73 5324.86,5528.45 5321.16,5527.57 5317.04,5526.57 5314.76,5526.14 5312.31,5525.83 5309.65,5525.67 5306.77,5525.72 5344.12,5563.07 5344.17,5560.19 5344.01,5557.53 5343.7,5555.08 5343.27,5552.8 5342.28,5548.68 5341.4,5544.98 5341.11,5543.22 5341,5541.5 5341.11,5539.78 5341.48,5538.04 5342.16,5536.25 5343.19,5534.4 5344.63,5532.46
  region net P3_6: 5346.52,5630.4 5339.45,5623.33 5337.38,5625.21 5335.44,5626.65 5333.59,5627.69 5331.8,5628.36 5330.07,5628.73 5328.34,5628.84 5326.62,5628.73 5324.86,5628.45 5321.16,5627.57 5317.04,5626.57 5314.76,5626.14 5312.31,5625.83 5309.65,5625.67 5306.77,5625.72 5344.12,5663.07 5344.17,5660.19 5344.01,5657.53 5343.7,5655.08 5343.27,5652.8 5342.28,5648.68 5341.4,5644.98 5341.11,5643.22 5341,5641.5 5341.11,5639.78 5341.48,5638.04 5342.16,5636.25 5343.19,5634.4 5344.63,5632.46
  region net KEY2: 5346.52,5730.4 5339.45,5723.33 5337.38,5725.21 5335.44,5726.65 5333.59,5727.69 5331.8,5728.36 5330.07,5728.73 5328.34,5728.84 5326.62,5728.73 5324.86,5728.45 5321.16,5727.57 5317.04,5726.57 5314.76,5726.14 5312.31,5725.83 5309.65,5725.67 5306.77,5725.72 5344.12,5763.07 5344.17,5760.19 5344.01,5757.53 5343.7,5755.08 5343.27,5752.8 5342.28,5748.68 5341.4,5744.98 5341.11,5743.22 5341,5741.5 5341.11,5739.78 5341.48,5738.04 5342.16,5736.25 5343.19,5734.4 5344.63,5732.46
  region net KEY1: 5352.44,5885 5367.61,5875 5365.34,5874.86 5363.15,5874.47 5361.05,5873.83 5359.02,5872.97 5357.09,5871.9 5355.25,5870.64 5353.51,5869.2 5351.87,5867.61 5350.33,5865.88 5348.9,5864.03 5346.38,5860.04 5344.34,5855.77 5342.81,5851.36 5314.64,5896.04 5317.57,5895.46 5320.28,5894.77 5325.11,5893.15 5329.41,5891.33 5333.45,5889.49 5337.5,5887.77 5341.84,5886.34 5344.19,5885.78 5346.73,5885.36 5349.46,5885.09
  region net P4_5: 7465.04,5056.1 7465.04,5066.1 7467.83,5066.23 7470.22,5066.58 7472.27,5067.16 7474.01,5067.94 7475.5,5068.91 7476.79,5070.05 7477.93,5071.35 7478.97,5072.79 7480.97,5076.03 7483.18,5079.65 7484.49,5081.56 7486,5083.52 7487.77,5085.51 7489.84,5087.51 7489.84,5034.69 7487.77,5036.7 7486,5038.69 7484.49,5040.64 7483.18,5042.55 7480.97,5046.17 7478.97,5049.41 7477.93,5050.85 7476.79,5052.15 7475.5,5053.29 7474.01,5054.26 7472.27,5055.04 7470.22,5055.62 7467.83,5055.98
  region net P4_6: 7465.04,5256.1 7465.04,5266.1 7467.83,5266.23 7470.22,5266.58 7472.27,5267.16 7474.01,5267.94 7475.5,5268.91 7476.79,5270.05 7477.93,5271.35 7478.97,5272.79 7480.97,5276.03 7483.18,5279.65 7484.49,5281.56 7486,5283.52 7487.77,5285.51 7489.84,5287.51 7489.84,5234.69 7487.77,5236.7 7486,5238.69 7484.49,5240.64 7483.18,5242.55 7480.97,5246.17 7478.97,5249.41 7477.93,5250.85 7476.79,5252.15 7475.5,5253.29 7474.01,5254.26 7472.27,5255.04 7470.22,5255.62 7467.83,5255.98
  region net $1N1689: 6190.67,6498.49 6180.67,6498.49 ccw(c6161.92,6498.49) 6173.17,6513.49 6198.17,6513.49 ccw(c6209.42,6498.49)
  region net $1N3306: 7129.75,6520.91 7129.75,6530.91 ccw(c7129.75,6549.66) 7144.75,6538.41 7144.75,6513.41 ccw(c7129.75,6502.16)
  region net $2N3730: 6830.04,5519.87 6820.04,5519.87 ccw(c6801.29,5519.87) 6812.54,5534.87 6837.54,5534.87 ccw(c6848.79,5519.87)
  region net $2N3732: 6916.83,5519.87 6906.83,5519.87 ccw(c6888.08,5519.87) 6899.33,5534.87 6924.33,5534.87 ccw(c6935.58,5519.87)
  region net $2N3734: 7009.16,5519.87 6999.16,5519.87 ccw(c6980.41,5519.87) 6991.66,5534.87 7016.66,5534.87 ccw(c7027.91,5519.87)
  region net $2N3736: 7098.72,5519.87 7088.72,5519.87 ccw(c7069.97,5519.87) 7081.22,5534.87 7106.22,5534.87 ccw(c7117.47,5519.87)
  region net $1N1012: 5653.89,6433.67 5663.89,6433.67 ccw(c5682.64,6433.67) 5671.39,6418.67 5646.39,6418.67 ccw(c5635.14,6433.67)
  region net $1N1016: 5863.52,6433.67 5873.52,6433.67 ccw(c5892.27,6433.67) 5881.02,6418.67 5856.02,6418.67 ccw(c5844.77,6433.67)
  region net $1N1689: 6180.67,6469.72 6190.67,6469.72 ccw(c6209.42,6469.72) 6198.17,6454.72 6173.32,6454.72 ccw(c6161.69,6469.72)
  region net +5V: 6279.39,6442.72 6279.39,6432.72 ccw(c6279.39,6413.97) 6264.39,6425.22 6264.39,6450.22 ccw(c6279.39,6461.47)
  region net D-: 5803.65,6312.6 5793.65,6312.6 ccw(c5774.9,6312.6) 5786.15,6327.6 5811.15,6327.6 ccw(c5822.4,6312.6)
  region net $1N847: 5793.65,6433.67 5803.65,6433.67 ccw(c5822.4,6433.67) 5811.15,6418.67 5786.15,6418.67 ccw(c5774.9,6433.67)
  region net D+: 5733.77,6312.6 5723.77,6312.6 ccw(c5705.02,6312.6) 5716.27,6327.6 5741.27,6327.6 ccw(c5752.52,6312.6)
  region net $1N819: 5723.77,6433.67 5733.77,6433.67 ccw(c5752.52,6433.67) 5741.27,6418.67 5716.27,6418.67 ccw(c5705.02,6433.67)
  region net $1N3306: 7117.61,6530.91 7117.61,6520.91 ccw(c7117.61,6502.16) 7102.61,6513.41 7102.61,6538.41 ccw(c7117.61,6549.66)
  region net 3V3: 7060.64,6599.58 7072.38,6609.06 ccw(c7096.24,6640.88) 7096.24,6601.1 7068.59,6575.72 ccw(c7028.82,6575.72)
  region net $2N462: 5990,5745.54 6000,5745.54 ccw(c6018.75,5745.54) 6007.5,5730.54 5982.5,5730.54 ccw(c5971.25,5745.54)
  region net 3V3: 6840.15,6365.43 6840.15,6380.43 ccw(c6840.15,6408.55) 6862.65,6391.68 6862.65,6369.8 ccw(c6862.65,6309.77)
  region net $2N2370: 6911.67,6450 6911.67,6440 ccw(c6911.67,6421.25) 6896.67,6432.5 6896.67,6457.5 ccw(c6911.67,6468.75)
  region net $2N2370: 6995.31,6450 6995.31,6440 ccw(c6995.31,6421.25) 6980.31,6432.5 6980.31,6457.5 ccw(c6995.31,6468.75)
  region net $2N2370: 6931.29,6440 6931.29,6450 ccw(c6931.29,6468.75) 6946.29,6457.5 6946.29,6432.5 ccw(c6931.29,6421.25)
  region net P3_2: 6968.3,6354.8 6958.3,6354.8 ccw(c6939.55,6354.8) 6950.8,6369.8 6975.8,6369.8 ccw(c6987.05,6354.8)
  region net +5V: 6448.04,5942.5 6448.04,5927.5 ccw(c6448.04,5896.12) 6425.54,5917.99 6425.54,5952.01 ccw(c6448.04,5973.88)
  region net $1N3863: 6347.44,5967.01 6357.44,5967.01 ccw(c6376.19,5967.01) 6364.94,5952.01 6339.94,5952.01 ccw(c6328.69,5967.01)
  region net LED1: 6825,5383.72 6815,5383.72 ccw(c6796.25,5383.72) 6807.5,5398.72 6832.5,5398.72 ccw(c6843.75,5383.72)
  region net $2N3730: 6820.04,5504.79 6830.04,5504.79 ccw(c6848.79,5504.79) 6837.54,5489.79 6812.54,5489.79 ccw(c6801.29,5504.79)
  region net LED2: 6910,5383.72 6900,5383.72 ccw(c6875.69,5383.72) 6894.82,5398.72 6917.5,5398.72 ccw(c6928.75,5383.72)
  region net $2N3732: 6906.83,5504.79 6916.83,5504.79 ccw(c6935.58,5504.79) 6924.33,5489.79 6899.33,5489.79 ccw(c6888.08,5504.79)
  region net LED3: 7005.27,5383.72 6995.27,5383.72 ccw(c6976.52,5383.72) 6987.77,5398.72 7012.77,5398.72 ccw(c7024.02,5383.72)
  region net $2N3734: 6999.16,5504.79 7009.16,5504.79 ccw(c7027.91,5504.79) 7016.66,5489.79 6991.66,5489.79 ccw(c6980.41,5504.79)
  region net $2N3736: 7088.72,5504.79 7098.72,5504.79 ccw(c7118.27,5504.79) 7105.72,5489.79 7081.22,5489.79 ccw(c7069.97,5504.79)
  region net KEY1: 5787.69,5670.58 5795.89,5676.52 ccw(c5811.8,5697.73) 5811.8,5671.22 5792.99,5654.67 ccw(c5766.48,5654.67)
  region net KEY1: 5829.66,5660.34 5829.66,5650.34 ccw(c5838.94,5642.84) 5827.01,5642.84 5827.01,5667.84 ccw(c5838.94,5667.84)
  region net $2N4037: 5810,5745.54 5820,5745.54 ccw(c5839.56,5745.54) 5827.01,5730.54 5802.5,5730.54 ccw(c5791.25,5745.54)
  region net KEY2: 5659.36,5627.71 5636.59,5636.34 ccw(c5620.68,5615.13) 5620.68,5641.65 5652.09,5641.65 ccw(c5677.91,5646.26)
  region net KEY2: 5603.07,5652.52 5603.07,5662.52 ccw(c5603.07,5681.27) 5618.07,5670.02 5618.07,5645.02 ccw(c5603.07,5633.77)
  region net $2N4054: 5630,5747.72 5640,5747.72 ccw(c5658.75,5747.72) 5647.5,5732.72 5622.5,5732.72 ccw(c5611.25,5747.72)
  region net +5V: 6329.18,6628.26 6314.18,6628.26 6313.93,6631.08 6313.22,6634.17 6312.12,6637.38 6310.69,6640.58 6308.99,6643.65 6307.09,6646.46 6305.05,6648.87 6302.93,6650.76 6340.43,6650.76 6338.31,6648.87 6336.27,6646.46 6334.37,6643.65 6332.67,6640.58 6331.24,6637.38 6330.14,6634.17 6329.43,6631.08
  region net 5V_USB: 6250.44,6628.26 6235.44,6628.26 6235.19,6631.08 6234.48,6634.17 6233.38,6637.38 6231.95,6640.58 6230.25,6643.65 6228.35,6646.46 6226.31,6648.87 6224.19,6650.76 6261.69,6650.76 6259.57,6648.87 6257.53,6646.46 6255.63,6643.65 6253.93,6640.58 6252.5,6637.38 6251.4,6634.17 6250.69,6631.08
  region net NRST: 6005,6051.14 5995,6051.14 ccw(c5976.25,6051.14) 5987.5,6066.14 6012.5,6066.14 ccw(c6023.75,6051.14)
  region net $2N462: 6000,5747.99 5990,5747.99 ccw(c5971.25,5747.99) 5982.5,5762.99 6007.5,5762.99 ccw(c6018.75,5747.99)
  region net $2N2370: 7059.7,6429.81 7061.33,6442.31 ccw(c7077.24,6463.52) 7077.24,6437.01 7065,6413.9 ccw(c7038.48,6413.9)
  region net $2N4037: 5820,5752.99 5810,5752.99 ccw(c5791.25,5752.99) 5802.5,5767.99 5827.5,5767.99 ccw(c5838.75,5752.99)
  region net $2N4054: 5640,5752.99 5630,5752.99 ccw(c5611.25,5752.99) 5622.5,5767.99 5647.5,5767.99 ccw(c5658.75,5752.99)
  region net 3V3: 6624.79,6472.5 6624.79,6457.5 ccw(c6624.79,6429.38) 6602.29,6446.25 6602.29,6483.75 ccw(c6624.79,6500.62)
  region net +5V: 6562.5,6330.3 6547.5,6330.3 ccw(c6519.38,6330.3) 6536.25,6352.8 6573.75,6352.8 ccw(c6590.62,6330.3)
  region net 3V3: 6797.5,6380 6782.5,6380 ccw(c6768,6380) 6771.25,6394.13 6808.75,6394.13 ccw(c6812,6380)
  region net 3V3: 6718.36,6457.5 6718.36,6472.5 ccw(c6718.36,6500.62) 6740.86,6483.75 6740.86,6446.25 ccw(c6718.36,6429.38)
  region net 3V3: 6852.97,6513.55 6844.83,6484.2 ccw(c6877.95,6451.08) 6832.99,6464.21 6832.99,6501.71 ccw(c6819.85,6546.67)
  region net D+: 6135,6015.08 6125,6015.08 6124.92,6016.47 6124.68,6017.84 6123.84,6020.45 6122.66,6022.86 6121.3,6025.02 6118.76,6028.37 6117.92,6029.45 6117.6,6030.08 6142.4,6030.08 6142.08,6029.45 6141.24,6028.37 6138.7,6025.02 6137.34,6022.86 6136.16,6020.45 6135.32,6017.84 6135.08,6016.47
  region net D-: 6175,6093.7 6185,6093.7 6185.08,6092.31 6185.32,6090.94 6186.16,6088.33 6187.34,6085.92 6188.7,6083.76 6191.24,6080.41 6192.08,6079.32 6192.4,6078.7 6167.6,6078.7 6167.92,6079.32 6168.76,6080.41 6171.3,6083.76 6172.66,6085.92 6173.84,6088.33 6174.68,6090.94 6174.92,6092.31
  region net D-: 6185,6015.08 6175,6015.08 6174.92,6016.47 6174.68,6017.84 6173.84,6020.45 6172.66,6022.86 6171.3,6025.02 6168.76,6028.37 6167.92,6029.45 6167.6,6030.08 6192.4,6030.08 6192.08,6029.45 6191.24,6028.37 6188.7,6025.02 6187.34,6022.86 6186.16,6020.45 6185.32,6017.84 6185.08,6016.47
  region net $1N3863: 6300.29,6041.17 6305.43,6021.89 6301.1,6026.55 6298.92,6028.9 6296.87,6030.91 6295.09,6032.3 6294.33,6032.68 6293.67,6032.81 6293.14,6032.65 6292.74,6032.16 6292.49,6031.31 6292.4,6030.08 6292.4,6054.49 6292.58,6052.48 6293.08,6050.61 6293.86,6048.86 6294.87,6047.22 6296.06,6045.65 6297.4,6044.13
  region net $1N3751: 6125,6304.92 6135,6304.92 6135.08,6303.53 6135.32,6302.16 6136.16,6299.55 6137.34,6297.14 6138.7,6294.98 6141.24,6291.63 6142.08,6290.55 6142.4,6289.92 6117.6,6289.92 6117.92,6290.55 6118.76,6291.63 6121.3,6294.98 6122.66,6297.14 6123.84,6299.55 6124.68,6302.16 6124.92,6303.53
  region net P1_3: 6185,6226.3 6175,6226.3 6174.92,6227.69 6174.68,6229.06 6173.84,6231.67 6172.66,6234.08 6171.3,6236.24 6168.76,6239.59 6167.92,6240.68 6167.6,6241.3 6192.4,6241.3 6192.08,6240.68 6191.24,6239.59 6188.7,6236.24 6187.34,6234.08 6186.16,6231.67 6185.32,6229.06 6185.08,6227.69
  region net P1_2: 6235,6226.3 6225,6226.3 6224.92,6227.69 6224.68,6229.06 6223.84,6231.67 6222.66,6234.08 6221.3,6236.24 6218.76,6239.59 6217.92,6240.68 6217.6,6241.3 6242.4,6241.3 6242.08,6240.68 6241.24,6239.59 6238.7,6236.24 6237.34,6234.08 6236.16,6231.67 6235.32,6229.06 6235.08,6227.69
  region net +5V: 6314.9,6280.06 6314.9,6265.06 6310.7,6265.04 6306.64,6264.88 6302.84,6264.47 6299.43,6263.65 6297.92,6263.06 6296.55,6262.31 6295.35,6261.4 6294.34,6260.31 6293.51,6259.03 6292.91,6257.52 6292.53,6255.79 6292.4,6253.81 6292.4,6289.92 6292.53,6287.96 6292.91,6286.27 6293.51,6284.83 6294.34,6283.63 6295.35,6282.65 6296.55,6281.86 6297.92,6281.24 6299.43,6280.77 6302.84,6280.21 6306.64,6280.02
  region net $1N819: 5797.38,6537.62 5807.38,6537.62 ccw(c5826.41,6537.62) 5808.28,6531.82 5796.47,6531.82 ccw(c5778.34,6537.62)
  region net $1N819: 5758.01,6537.62 5768.01,6537.62 ccw(c5787.04,6537.62) 5768.91,6531.82 5757.1,6531.82 ccw(c5738.97,6537.62)
  region net $1N1012: 5728.63,6478.63 5718.63,6478.63 ccw(c5664.14,6478.63) 5717.72,6488.52 5729.53,6488.52 ccw(c5783.11,6478.63)
  region net GND: 5660.28,6483.21 5650.42,6487.49 ccw(c5629.2,6503.4) 5655.72,6503.4 5676.19,6488.52 ccw(c5676.19,6462)
  region net +5V: 6340.41,6489.52 6325.41,6489.52 ccw(c6290.6,6489.52) 6317.16,6512.02 6348.66,6512.02 ccw(c6375.22,6489.52)
  region net +5V: 6325.41,6569.96 6340.41,6569.96 ccw(c6375.22,6569.96) 6348.66,6547.46 6317.16,6547.46 ccw(c6290.6,6569.96)
  region: 6727.12,5766.47 6717.12,5766.47 6717.03,5767.59 6716.78,5768.72 6715.89,5770.95 6714.62,5773.04 6713.17,5774.87 6731.07,5774.87 6729.62,5773.04 6728.36,5770.95 6727.46,5768.72 6727.21,5767.59
  region net P1_1: 6675,5801.59 6665,5801.59 6664.91,5802.73 6664.66,5803.89 6663.77,5806.21 6662.5,5808.4 6661.05,5810.27 6678.95,5810.27 6677.5,5808.4 6676.23,5806.21 6675.34,5803.89 6675.09,5802.73
  region net P5_2: 6579.02,5878.59 6569.02,5878.59 6568.93,5879.71 6568.68,5880.84 6567.78,5883.07 6566.52,5885.17 6565.07,5886.99 6582.97,5886.99 6581.52,5885.17 6580.25,5883.07 6579.36,5880.84 6579.1,5879.71
  region net +5V: 6602.5,5993 6617.5,5993 6617.41,5990.61 6617.38,5988.47 6617.5,5987.47 6617.77,5986.5 6618.24,5985.54 6618.95,5984.59 6601.05,5984.59 6601.76,5985.54 6602.23,5986.5 6602.5,5987.47 6602.62,5988.47 6602.59,5990.61
  region net +5V: 6448.59,5927.5 6448.59,5942.5 6450.98,5942.41 6453.12,5942.38 6454.12,5942.5 6455.09,5942.77 6456.05,5943.24 6456.99,5943.95 6456.99,5926.05 6456.05,5926.76 6455.09,5927.23 6454.12,5927.5 6453.12,5927.62 6450.98,5927.59
  region net P1_5: 6262.86,5964.71 6255.79,5957.64 6254.93,5958.37 6253.96,5959 6251.74,5959.94 6249.37,5960.53 6247.05,5960.79 6259.71,5973.45 6259.98,5971.13 6260.56,5968.76 6261.51,5966.55 6262.13,5965.57
  region net NRST: 5995,6051.91 6005,6051.91 6005.09,6050.79 6005.34,6049.66 6006.23,6047.42 6007.5,6045.33 6008.95,6043.5 5991.05,6043.5 5992.5,6045.33 5993.77,6047.42 5994.66,6049.66 5994.91,6050.79
  region net P2_0: 6143.37,5133.04 6153.37,5133.04 6153.46,5131.92 6153.71,5130.79 6154.6,5128.56 6155.87,5126.47 6157.32,5124.64 6139.42,5124.64 6140.87,5126.47 6142.13,5128.56 6143.03,5130.79 6143.28,5131.92
  region net P2_2: 6193.29,5098.12 6203.29,5098.12 6203.38,5097 6203.63,5095.86 6204.53,5093.63 6205.79,5091.54 6207.24,5089.71 6189.34,5089.71 6190.79,5091.54 6192.06,5093.63 6192.95,5095.86 6193.21,5097
  region net D-: 6185,6133.59 6175,6133.59 6174.91,6134.71 6174.66,6135.84 6173.77,6138.07 6172.5,6140.17 6171.05,6141.99 6188.95,6141.99 6187.5,6140.17 6186.23,6138.07 6185.34,6135.84 6185.09,6134.71
  region net D-: 6164.86,6158.07 6171.93,6165.14 6172.79,6164.41 6173.76,6163.79 6175.98,6162.84 6178.35,6162.26 6180.67,6161.99 6168.01,6149.33 6167.74,6151.65 6167.16,6154.02 6166.21,6156.24 6165.59,6157.21
  region net P0_3: 6753.59,5640 6753.59,5650 6754.71,5650.09 6755.84,5650.34 6758.07,5651.23 6760.17,5652.5 6761.99,5653.95 6761.99,5636.05 6760.17,5637.5 6758.07,5638.77 6755.84,5639.66 6754.71,5639.91
  region net P3_2: 6949.85,6325.43 6956.93,6318.35 6956.19,6317.5 6955.57,6316.52 6954.63,6314.31 6954.04,6311.94 6953.77,6309.62 6941.12,6322.27 6943.44,6322.54 6945.81,6323.13 6948.02,6324.07 6949,6324.7
  region net LED3: 6992.2,5280.13 6985.13,5287.2 6985.86,5288.06 6986.48,5289.04 6987.43,5291.25 6988.02,5293.62 6988.28,5295.94 7000.94,5283.28 6998.62,5283.02 6996.25,5282.43 6994.04,5281.48 6993.06,5280.86
  region net LED3: 6995.27,5311.68 7005.27,5311.68 7005.36,5310.56 7005.61,5309.43 7006.51,5307.2 7007.77,5305.11 7009.22,5303.28 6991.32,5303.28 6992.77,5305.11 6994.04,5307.2 6994.93,5309.43 6995.18,5310.56
  region net LED2: 6896.93,5324.86 6889.86,5331.93 6890.59,5332.79 6891.21,5333.76 6892.16,5335.98 6892.74,5338.35 6893.01,5340.67 6905.67,5328.01 6903.35,5327.74 6900.98,5327.16 6898.76,5326.21 6897.79,5325.59
  region net LED2: 6900,5356.41 6910,5356.41 6910.09,5355.29 6910.34,5354.16 6911.23,5351.93 6912.5,5349.83 6913.95,5348.01 6896.05,5348.01 6897.5,5349.83 6898.77,5351.93 6899.66,5354.16 6899.91,5355.29
  region net LED1: 6815,5381.41 6825,5381.41 6825.09,5380.29 6825.34,5379.16 6826.23,5376.93 6827.5,5374.83 6828.95,5373.01 6811.05,5373.01 6812.5,5374.83 6813.77,5376.93 6814.66,5379.16 6814.91,5380.29
  region net LED1: 6811.93,5349.86 6804.86,5356.93 6805.59,5357.79 6806.21,5358.76 6807.16,5360.98 6807.74,5363.35 6808.01,5365.67 6820.67,5353.01 6818.35,5352.74 6815.98,5352.16 6813.76,5351.21 6812.79,5350.59
  region net 3V3: 7187.5,5301.41 7202.5,5301.41 7202.41,5299.02 7202.38,5296.88 7202.5,5295.88 7202.77,5294.91 7203.24,5293.95 7203.95,5293.01 7186.05,5293.01 7186.76,5293.95 7187.23,5294.91 7187.5,5295.88 7187.62,5296.88 7187.59,5299.02
  region net GND: 5643.07,6480.14 5650.14,6473.07 5649.41,6472.21 5648.79,6471.24 5647.84,6469.02 5647.26,6466.65 5646.99,6464.33 5634.33,6476.99 5636.65,6477.26 5639.02,6477.84 5641.24,6478.79 5642.21,6479.41
  region net 5V_USB: 5844.64,6580 5844.64,6590 ccw(c5844.64,7040.12) 5859.64,6590.25 5859.64,6579.75 ccw(c5844.64,6129.88)
  region net $1N847: 5803.65,6430 cw(c5853.65,6430) 5813.65,6460 5798.65,6465
  region net 3V3: 7057.5,6658.11 cw(c6948.86,6658.11) 7025.68,6581.29 7031.09,6565.49 cw(c7068.91,6527.67) 7080.3,6579.92 7090.9,6590.53 7072.46,6609.25
  region net 3V3: 6842.5,6365.43 ccw(c6842.5,6290.43) 6797.5,6350.43 6790,6372.93
  region net +5V: 6805.71,6643.64 6787.39,6639.46 ccw(c6748.25,6678.61) 6796.54,6651.54 6819.04,6651.54 ccw(c6827.79,6621.56)
Bottom Layer:
  region net D-: 6692.86,6680 6692.86,6690 6694.2,6690.17 6695.42,6690.65 6696.53,6691.41 6697.55,6692.41 6698.49,6693.62 6699.37,6695 6700.99,6698.1 6704.07,6704.72 6705.76,6707.65 6706.69,6708.9 6707.69,6709.94 6707.69,6660.06 6706.69,6661.1 6705.76,6662.35 6704.07,6665.28 6700.99,6671.9 6699.37,6675 6698.49,6676.38 6697.55,6677.59 6696.53,6678.59 6695.42,6679.35 6694.2,6679.83
  region net P0_2: 7465.04,5856.1 7465.04,5866.1 7467.83,5866.23 7470.22,5866.58 7472.27,5867.16 7474.01,5867.94 7475.5,5868.91 7476.79,5870.05 7477.93,5871.35 7478.97,5872.79 7480.97,5876.03 7483.18,5879.65 7484.49,5881.56 7486,5883.52 7487.77,5885.51 7489.84,5887.51 7489.84,5834.69 7487.77,5836.7 7486,5838.69 7484.49,5840.64 7483.18,5842.55 7480.97,5846.17 7478.97,5849.41 7477.93,5850.85 7476.79,5852.15 7475.5,5853.29 7474.01,5854.26 7472.27,5855.04 7470.22,5855.62 7467.83,5855.98
  region net +5V: 6603.7,5959.68 6593.09,5970.29 6594.85,5971.91 6596.38,5973.4 6597,5974.2 6597.5,5975.08 6597.84,5976.08 6598.01,5977.26 6610.67,5964.6 6609.49,5964.43 6608.49,5964.09 6607.61,5963.59 6606.81,5962.97 6605.32,5961.43
  region net +5V: 6481.41,5942.5 6481.41,5927.5 6479.02,5927.59 6476.88,5927.62 6475.88,5927.5 6474.91,5927.23 6473.95,5926.76 6473.01,5926.05 6473.01,5943.95 6473.95,5943.24 6474.91,5942.77 6475.88,5942.5 6476.88,5942.38 6479.02,5942.41
  region net NRST: 6015.14,6027.43 6008.07,6020.36 6007.21,6021.09 6006.24,6021.71 6004.02,6022.66 6001.65,6023.24 5999.33,6023.51 6011.99,6036.17 6012.26,6033.85 6012.84,6031.48 6013.79,6029.26 6014.41,6028.29
  region net D-: 6175,6166.41 6185,6166.41 6185.09,6165.29 6185.34,6164.16 6186.23,6161.93 6187.5,6159.83 6188.95,6158.01 6171.05,6158.01 6172.5,6159.83 6173.77,6161.93 6174.66,6164.16 6174.91,6165.29

## Silkscreen, mask and mechanical layers (free items; w line width, h text height)
Top Silkscreen Layer:
  lines w10: 5363.74,4711.1 5521.22,4711.1 ; 5363.74,5011.1 5521.22,5011.1 ; 5368.74,4811.1 5526.22,4811.1 ; 5368.74,4911.1 5526.22,4911.1 ; 5368.74,5111.1 5526.22,5111.1 ; 5368.74,5211.1 5526.22,5211.1 ; 5368.74,5311.1 5526.22,5311.1 ; 5368.74,5411.1 5526.22,5411.1 ; 5368.74,5511.1 5526.22,5511.1 ; 5368.74,5611.1 5526.22,5611.1 ; 5368.74,5711.1 5526.22,5711.1 ; 5368.74,5811.1 5526.22,5811.1 ; 5368.74,5911.1 5526.22,5911.1 ; 5368.74,6011.1 5526.22,6011.1 ; 5368.74,6111.1 5526.22,6111.1 ; 5368.74,6211.1 5526.22,6211.1 ; 5368.74,6311.1 5526.22,6311.1 ; 5368.74,6411.1 5526.22,6411.1 ; 5368.74,6511.1 5526.22,6511.1 ; 7298.74,4711.1 7456.22,4711.1 ; 7298.74,5011.1 7456.22,5011.1 ; 7303.74,4811.1 7461.22,4811.1 ; 7303.74,4911.1 7461.22,4911.1 ; 7303.74,5111.1 7461.22,5111.1 ; 7303.74,5211.1 7461.22,5211.1 ; 7303.74,5311.1 7461.22,5311.1 ; 7303.74,5411.1 7461.22,5411.1 ; 7303.74,5511.1 7461.22,5511.1 ; 7303.74,5611.1 7461.22,5611.1 ; 7303.74,5711.1 7461.22,5711.1 ; 7303.74,5811.1 7461.22,5811.1 ; 7303.74,5911.1 7461.22,5911.1 ; 7303.74,6011.1 7461.22,6011.1 ; 7303.74,6111.1 7461.22,6111.1 ; 7303.74,6211.1 7461.22,6211.1 ; 7303.74,6311.1 7461.22,6311.1 ; 7303.74,6411.1 7461.22,6411.1 ; 7303.74,6511.1 7461.22,6511.1 ; 5368.74,4611.1 5526.22,4611.1 5526.22,6611.1 5368.74,6611.1 5368.74,4611.1 ; 7303.74,4611.1 7461.22,4611.1 7461.22,6611.1 7303.74,6611.1 7303.74,4611.1
  text "P5_2" at 7320,6545 h47.24
  text "P5_3" at 5390,6540 h47.24
  text "P1_4" at 7320,6445 h47.24
  text "P1_5" at 5390,6440 h47.24
  text "P1_1" at 7320,6345 h47.24
  text "P1_6" at 5390,6340 h47.24
  text "P1_0" at 7320,6245 h47.24
  text "P1_7" at 5390,6240 h47.24
  text "P4_2" at 7320,6145 h47.24
  text "P4_3" at 5390,6140 h47.24
  text "P0_0" at 7320,6045 h47.24
  text "P3_2" at 5390,6040 h47.24
  text "P0_1" at 7320,5945 h47.24
  text "P3_3" at 5390,5940 h47.24
  text "P0_2" at 7320,5845 h47.24
  text "P3_4" at 5390,5840 h47.24
  text "P0_3" at 7320,5745 h47.24
  text "P3_5" at 5390,5740 h47.24
  text "P0_4" at 7320,5645 h47.24
  text "P3_6" at 5390,5640 h47.24
  text "P0_5" at 7320,5545 h47.24
  text "P3_7" at 5390,5540 h47.24
  text "P0_6" at 7320,5445 h47.24
  text "P4_0" at 5390,5440 h47.24
  text "P0_7" at 7320,5345 h47.24
  text "P2_0" at 5390,5340 h47.24
  text "P4_6" at 7320,5245 h47.24
  text "P2_1" at 5390,5240 h47.24
  text "P4_1" at 7320,5145 h47.24
  text "P2_2" at 5390,5140 h47.24
  text "P4_5" at 7320,5045 h47.24
  text "P2_3" at 5390,5040 h47.24
  text "P2_7" at 7320,4945 h47.24
  text "P2_4" at 5390,4940 h47.24
  text "P2_6" at 7320,4845 h47.24
  text "P5_0" at 5390,4840 h47.24
  text "P2_5" at 7320,4745 h47.24
  text "GND" at 5390,4740 h47.24
  text "P5_1" at 7320,4645 h47.24
  text "GND" at 5390,4640 h47.24